# Altium PCB Plate_C.PcbDoc
Units mm, origin at the board's own origin, x right, y up, seen from the top; angles counter-clockwise.
Board outline 100 x 100 mm, 2 copper layers (Top Layer, Bottom Layer), stack 0.97 mm thick; 6 components, 2 nets, 10 pads, 0 vias.
Unrouted connection lines stored in the file: 2.
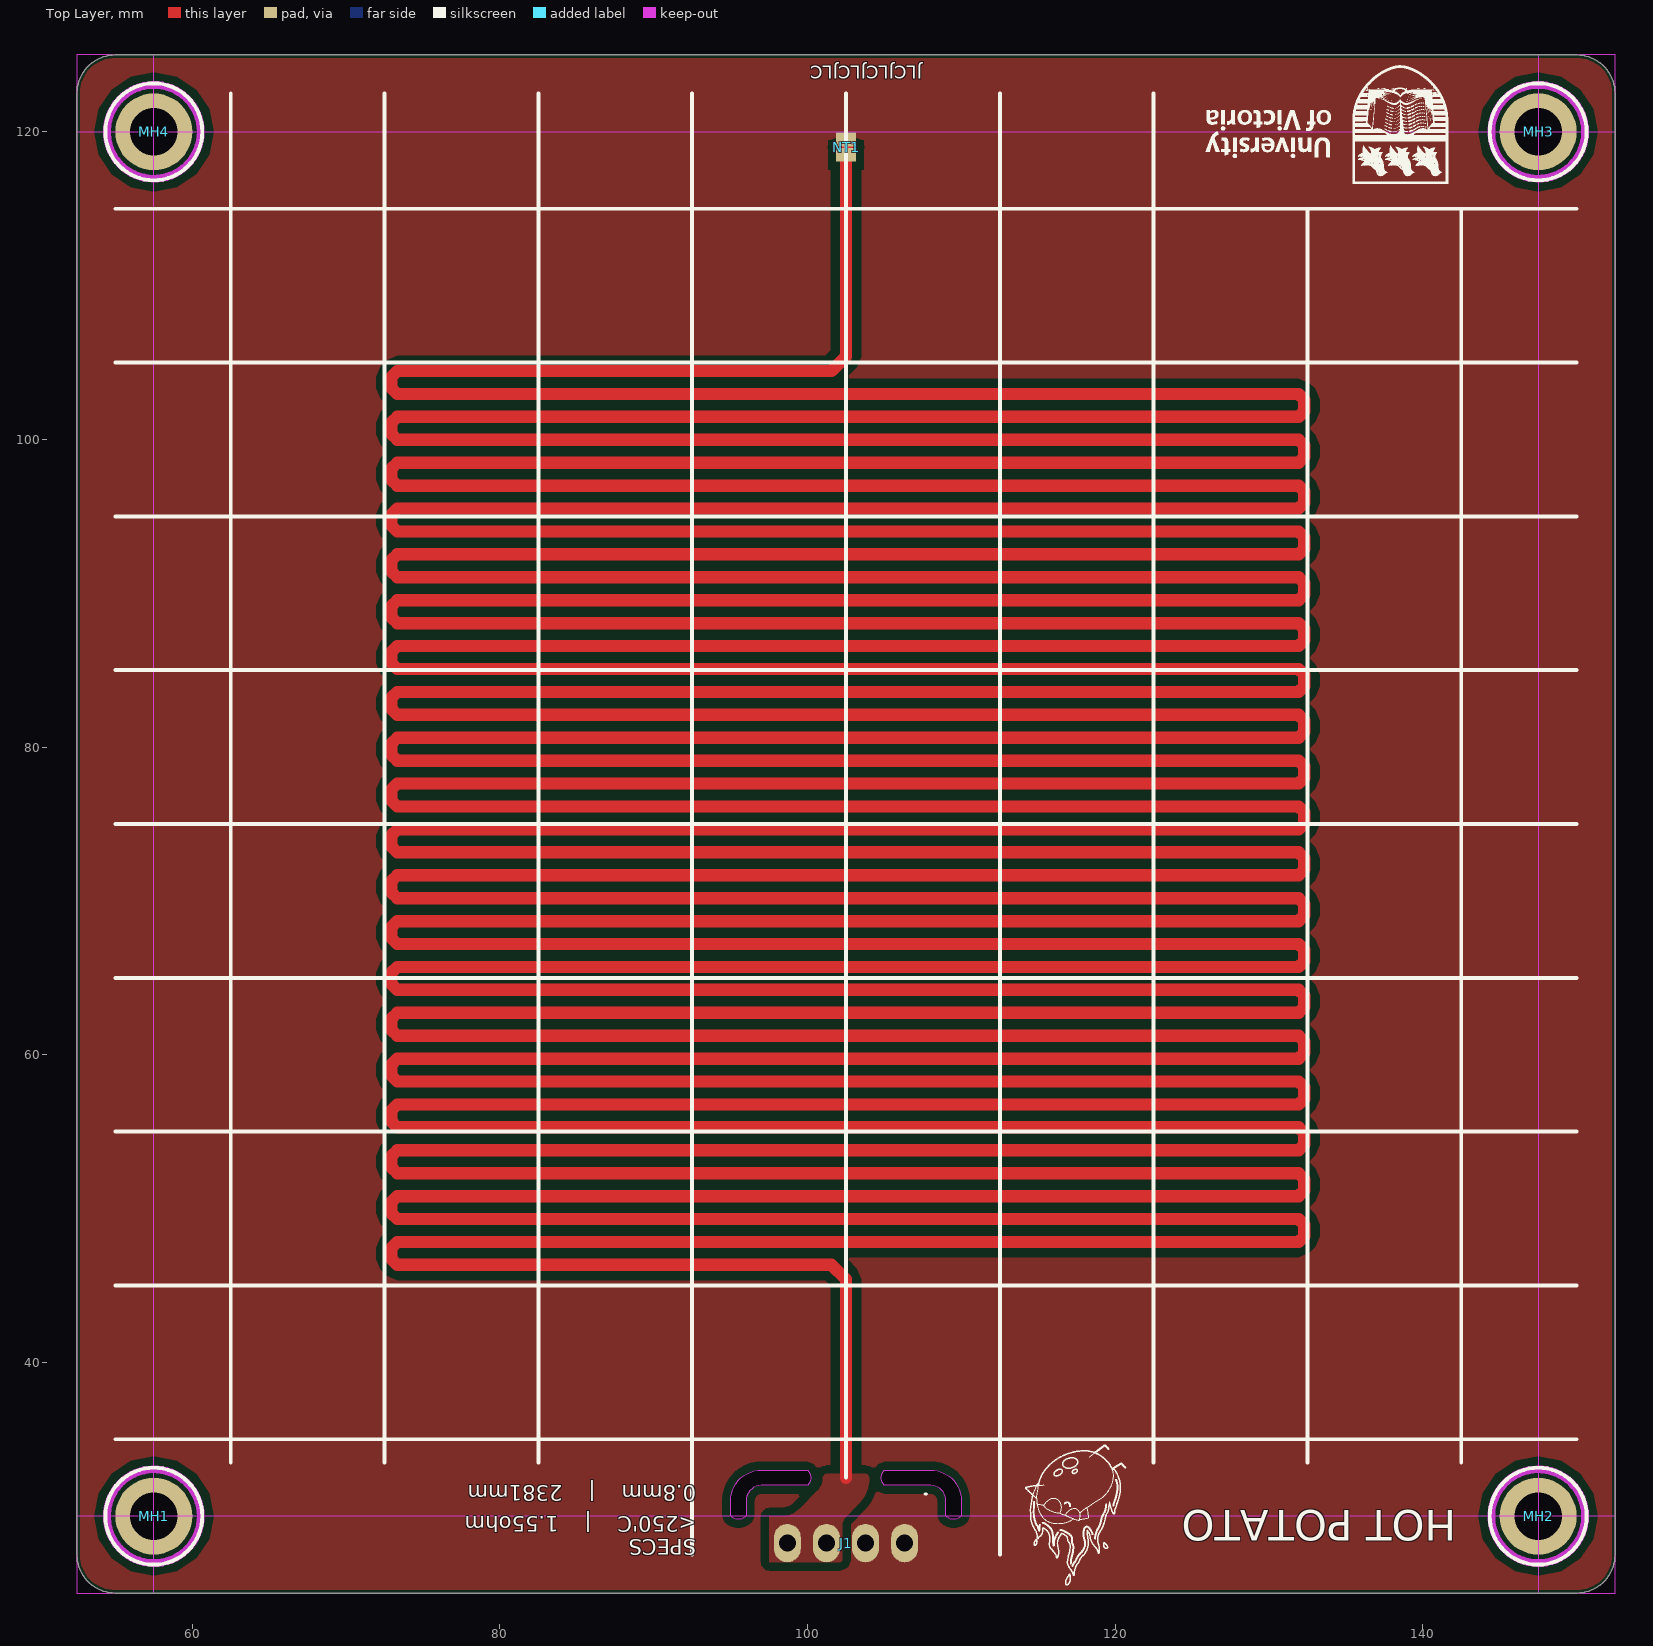
[diagram p0: Top Layer view]
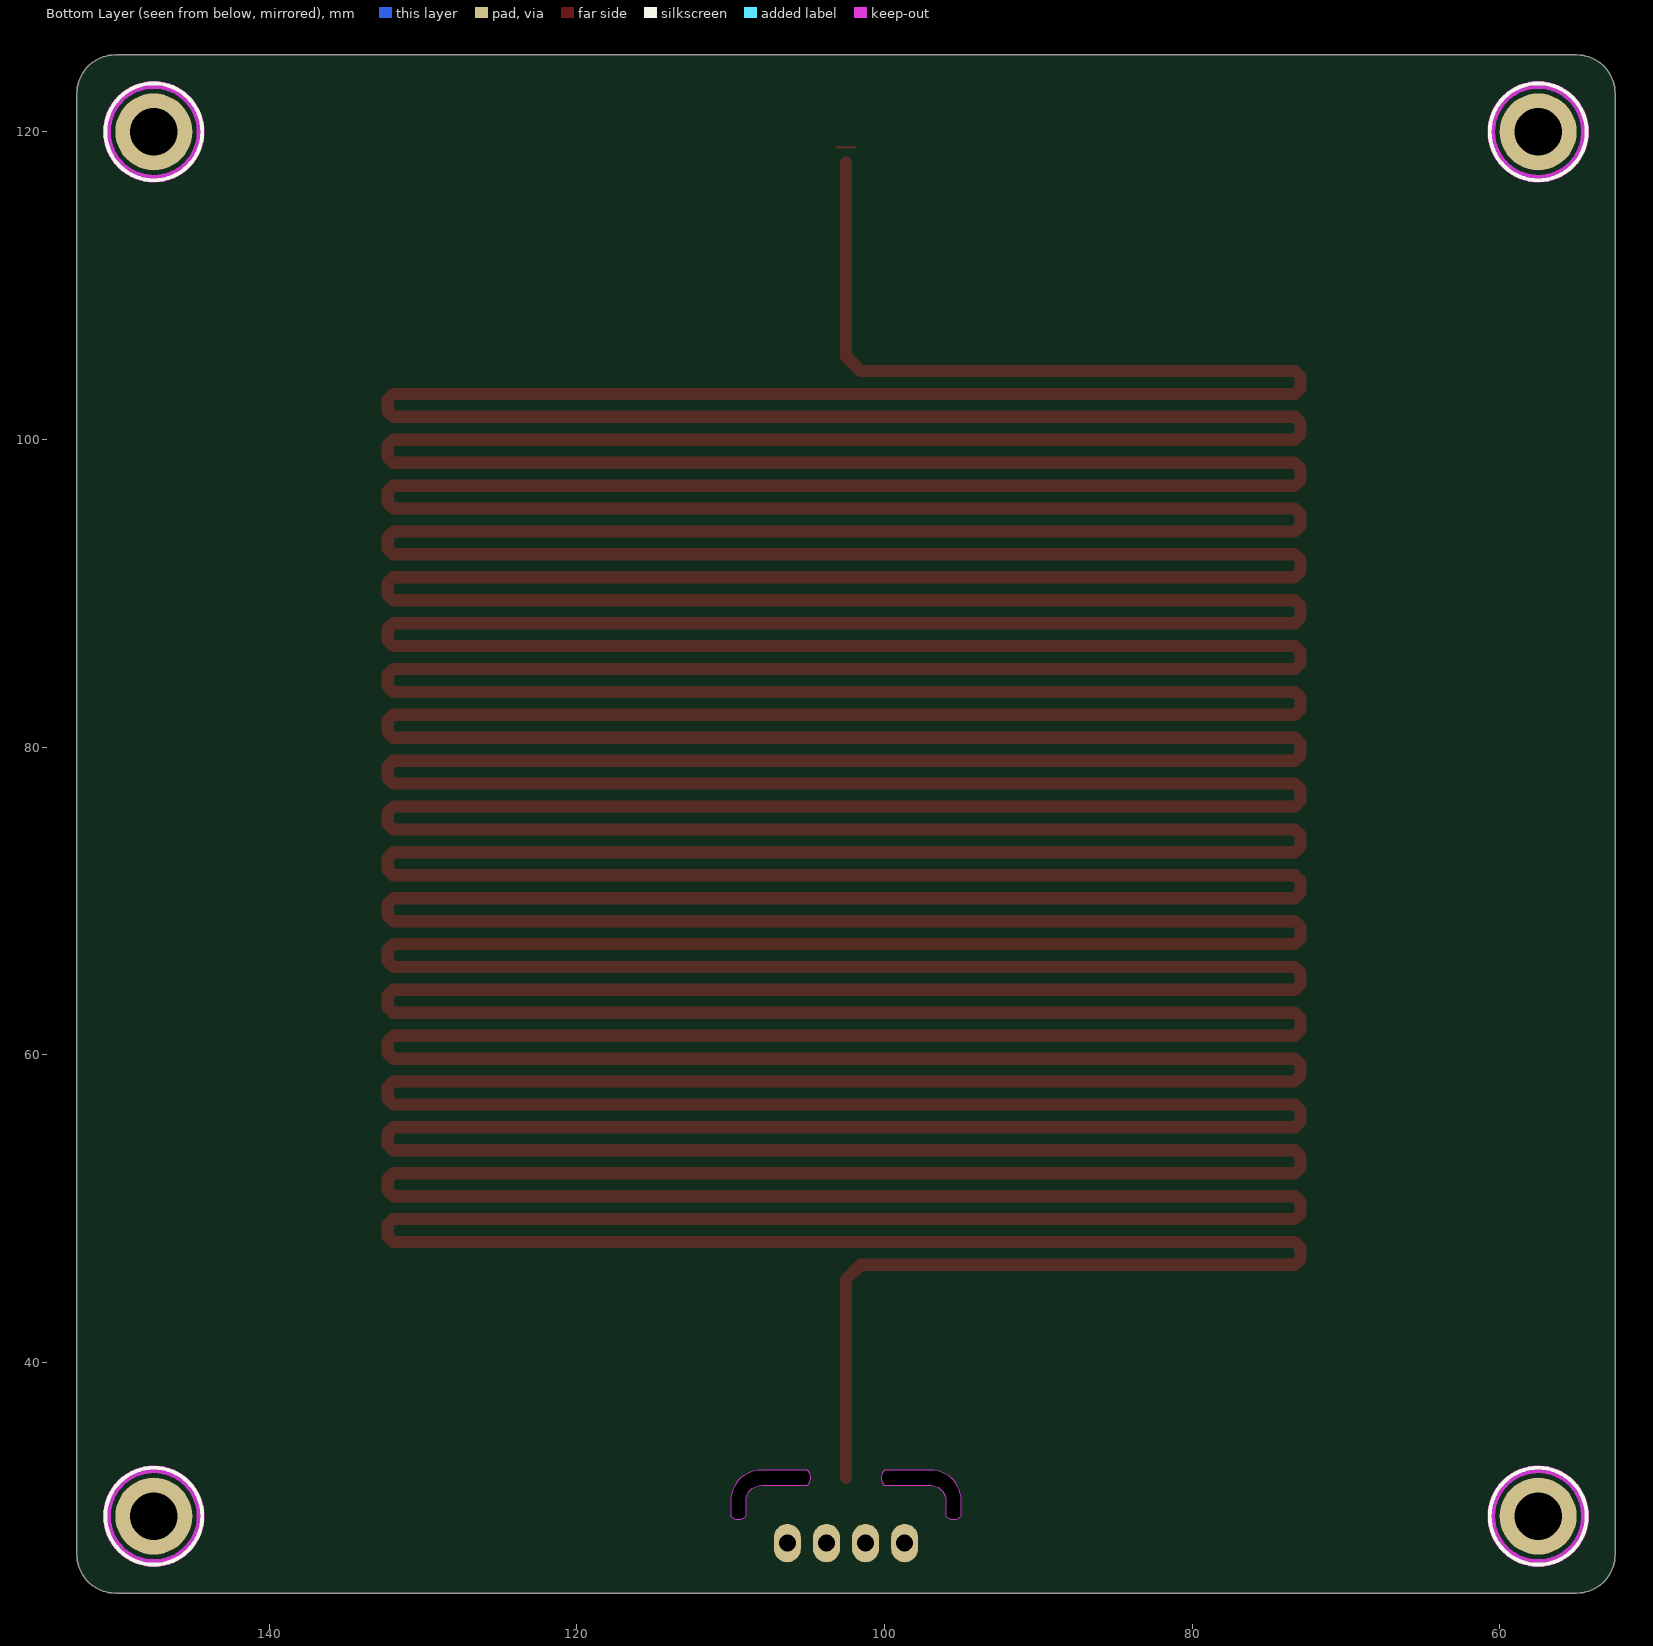
[diagram p1: Bottom Layer view, seen from below]

## Layer stack, top to bottom
Top Solder: solder mask 0.0127, Solder Resist, Dk 3.8
Top Layer: signal copper 0.035
Dielectric: core 0.9, FR-4, Dk 4.5
Bottom Layer: signal copper 0.035
Bottom Solder: solder mask 0.0127, Solder Resist, Dk 3.8

## Board outline
52.5,27.5 ccw(c55,27.5) 55,25 150,25 ccw(c150,27.5) 152.5,27.5 152.5,122.5 ccw(c150,122.5) 150,125 55,125 ccw(c55,122.5) 52.5,122.5
cut-out: 95,30 95,31 cw(c97,31) 97,33 100,33 cw(c99.5,32.5) 100,32 97,32 ccw(c97,31) 96,31 96,30 cw(c95.5,30.5)
cut-out: 105,32 cw(c105.5,32.5) 105,33 108,33 cw(c108,31) 110,31 110,30 cw(c109.5,30.5) 109,30 109,31 ccw(c108,31) 108,32

## Design rules (kind name [scope] priority, off if disabled: settings)
BoardOutlineClearance [All] p1: gap=0.2 ignorepadtopadclearanceinfootprint=FALSE
Clearance "Polygon Pour Clearance" [InPolygon] p1: gap=0.508 ignorepadtopadclearanceinfootprint=FALSE
Clearance [All] p2: gap=0.127 ignorepadtopadclearanceinfootprint=FALSE except(0.25: Arc-Hole Track-Hole SMDPad-Hole THPad-Hole Via-Hole Fill-Hole Poly-Hole Region-Hole Text-Hole)
ComponentClearance [All] p1: gap=0.127 collisioncheckmode=3 verticalgap=0.127 showdistances=TRUE
DiffPairsRouting [All] p1: maxlimit=0.254 minlimit=0.127 mostfreqgap=0.127 toplayer_minwidth=0.127 toplayer_maxwidth=25.4 toplayer_prefwidth=0.127 bottomlayer_minwidth=0.127 bottomlayer_maxwidth=25.4 bottomlayer_prefwidth=0.127 maxuncoupledlength=12.7
Height [All] p1: minheight=0 maxheight=1816.048 prefheight=12.7
HoleSize [All] p1: absolutevalues=TRUE maxlimit=6.3 minlimit=0.3 maxpercent=80.000 minpercent=20.000
HoleToHoleClearance [All] p1: gap=0.25 allowstackedmicrovias=FALSE
MinimumAnnularRing [All] p1: minimumring=0.076
MinimumSolderMaskSliver [All] p1: minsoldermaskwidth=0
PlaneClearance [All] p1: clearance=0.127
PlaneConnect PlaneConnectPowerPads [InPadClass('PowerPads')] p1: planeconnectstyle=Direct reliefexpansion=0.508 reliefentries=4 reliefconductorwidth=0.254 reliefairgap=0.254
PlaneConnect [All] p2: pad.planeconnectstyle=Relief pad.reliefexpansion=0.3 pad.reliefentries=4 pad.reliefconductorwidth=0.127 pad.reliefairgap=0.127 via.planeconnectstyle=Direct via.reliefexpansion=0.3 via.reliefentries=4 via.reliefconductorwidth=0.127 via.reliefairgap=0.127
PolygonConnect PolygonConnectPowerPads [All vs (InPadClass('PowerPads'))] p1: connectstyle=Direct reliefconductorwidth=0.254 reliefentries=4 polygonreliefangle="90 Angle" airgapwidth=0.254
PolygonConnect [All] p2: thpad.connectstyle=Relief thpad.reliefconductorwidth=0.127 thpad.reliefentries=4 thpad.polygonreliefangle="90 Angle" thpad.airgapwidth=0.127 smdpad.connectstyle=Relief smdpad.reliefconductorwidth=0.127 smdpad.reliefentries=4 smdpad.polygonreliefangle="90 Angle" smdpad.airgapwidth=0.127 via.connectstyle=Direct via.reliefconductorwidth=0.127 via.reliefentries=4 via.polygonreliefangle="90 Angle" via.airgapwidth=0.127
RoutingVias [All] p1: holewidth=0.3 width=0.6 viastyle="Through Hole" minholewidth=0.3 minwidth=0.6 maxholewidth=0.6 maxwidth=6.6
SilkToSilkClearance [All] p1: silktosilkclearance=0
SilkToSolderMaskClearance [IsPad] p1: minsilkscreentomaskgap=0.127 clearancetoexposedcopper=TRUE
SolderMaskExpansion [All] p1: expansion=0.075 istentingtop=FALSE
Width [All] p1: maxlimit=25.4 minlimit=0.127 preferedwidth=0.127 minimp=50.000000 maximp=50.000000 favimp=50.000000
20 further rules are at their usual default settings.

## Classes and differential pairs
component class plate: J1 MH1 MH2 MH3 MH4

## Components (designator, comment, footprint, x,y, rotation, side; value= is the part's Value field where it differs from the comment)
J1 "282834-4" "TE 282834-4" 102.5,28.25 r180 top
MH1 "3mm" Mount-Hole_3mm 57.5,30 r0 top locked
MH2 "3mm" Mount-Hole_3mm 147.5,30 r0 top locked
MH3 "3mm" Mount-Hole_3mm 147.5,120 r0 top locked
MH4 "3mm" Mount-Hole_3mm 57.5,120 r0 top locked
NT1 "Net Tie" NetTie_50mil 102.5,119 r270 top net-tie

## Footprints (in the part's own frame and the unit in brackets; to place one, negate y for a bottom-side part, rotate by r counter-clockwise, add the part's x,y. Pads: shape width x height; smd on the part's side, far side on the other; paste and mask are expansions set on the pad)
Mount-Hole_3mm [mm]
  round 5 hole 3.1: 1(0,0)
  Keep-Out Layer circle w0.508: c0,0 r3.048
  silkscreen extent -3.15,-3.15 3.15,3.15, body extent -2.25,-2.6 2.25,2.6, height 4.19
NetTie_50mil [mm]
  rect 0.889x1.27 smd mask+0.102: 1(-0.5,0) 2(0.5,0)
  Top Layer region: -0.075,0.635 0.075,0.635 0.075,-0.635 -0.075,-0.635
"TE 282834-4" [mm]
  oval 1.75x2.5 hole 1.1: 1(-3.81,0) 2(-1.27,0) 3(1.27,0) 4(3.81,0)
  silkscreen extent -5.24,-3.2 -5.14,-3.2, body extent -5.31,-3.25 5.31,3.25, height 10

## Part data
J1: "TERM BLK 4P SIDE ENT 2.54MM PCB", Color=Green, Current=10A, Manufacturer="TE Connectivity AMP Connectors", Supplier Part Number 1=A98335-ND, Voltage=150V, ComponentLink1Description=Datasheet, ComponentLink1URL=https://www.te.com/commerce/DocumentDelivery/DDEController?Action=srchrtrv&DocNm=282834&DocType=Customer+Drawing&DocLang=English, ComponentLink2Description="DigiKey Link", ComponentLink2URL=http://digikey.com/product-detail/en/te-connectivity-amp-connectors/282834-4/A98335-ND/1153265, LastUpdated="2020-01-15 4:16:05 AM", Lifecycle Status=Active, Mating Orientation="Horizontal with Board", Minimum Order=1, Mounting Type="Through Hole", Number of Levels=1, Packaging=Bulk, Part Number=282834-4, Part Status=Active, Pitch="0.100\" (2.54mm)", Positions Per Level=4, Price=2.68, Series=Buchanan, Supplier 1=DigiKey, Wire Gauge="16-30 AWG", Wire Termination="Screw - Rising Cage Clamp"
MH1 MH2 MH3 MH4: library part Mount_Hole_3mm, "Mounting Hole 3mm plated"
NT1: library part NetTie_50mil, "Net Tie with 50mil trace"

## Nets (pads, with @x,y where several pads share a name; then routed paths per layer and width w, separated by ;. In a path a pad name is that pad's centre, name@x,y a point inside that pad or via, vN(x,y) a via of type N, cw(c..) or ccw(c..) an arc to the next point about the centre after c; other vN are vias at no path point)
PWR: J1.3 J1.4 NT1.2 | length 2381.5
  Top Layer w0.8: 102.5,32.5 102.5,45 102.5,45.4 101.563,46.337 73.33,46.337 72.958,46.71 72.958,47.455 73.33,47.827 131.928,47.827 132.301,48.2 132.301,48.945 131.928,49.317 73.33,49.317 72.958,49.69 72.958,50.435 73.33,50.807 131.928,50.807 132.301,51.18 132.301,51.925 131.928,52.297 73.33,52.297 72.958,52.67 72.958,53.415 73.33,53.787 131.928,53.787 132.301,54.16 132.301,54.905 131.928,55.277 73.33,55.277 72.958,55.65 72.958,56.395 73.33,56.767 131.928,56.767 132.301,57.14 132.301,57.885 131.928,58.257 73.33,58.257 72.958,58.63 72.958,59.375 73.33,59.747 131.928,59.747 132.301,60.12 132.301,60.865 131.928,61.237 73.33,61.237 72.958,61.61 72.958,62.355 73.33,62.727 131.928,62.727 132.301,63.1 132.301,63.845 131.928,64.217 73.33,64.217 72.958,64.59 72.958,65.335 73.33,65.707 131.928,65.707 132.301,66.08 132.301,66.825 131.928,67.197 73.33,67.197 72.958,67.57 72.958,68.315 73.33,68.687 131.928,68.687 132.301,69.06 132.301,69.805 131.928,70.177 73.33,70.177 72.958,70.55 72.958,71.295 73.33,71.667 131.928,71.667 132.301,72.04 132.301,72.785 131.928,73.157 73.33,73.157 72.958,73.53 72.958,74.275 73.33,74.647 131.928,74.647 132.301,75.02 132.301,75.765 131.928,76.137 73.33,76.137 72.958,76.51 72.958,77.255 73.33,77.627 131.928,77.627 132.301,78 132.301,78.745 131.928,79.117 73.33,79.117 72.958,79.49 72.958,80.235 73.33,80.607 131.928,80.607 132.301,80.98 132.301,81.725 131.928,82.097 73.33,82.097 72.958,82.47 72.958,83.215 73.33,83.587 131.928,83.587 132.301,83.96 132.301,84.705 131.928,85.077 73.33,85.077 72.958,85.45 72.958,86.195 73.33,86.567 131.928,86.567 132.301,86.94 132.301,87.685 131.928,88.057 73.33,88.057 72.958,88.43 72.958,89.175 73.33,89.547 131.928,89.547 132.301,89.92 132.301,90.665 131.928,91.037 73.33,91.037 72.958,91.41 72.958,92.155 73.33,92.527 131.928,92.527 132.301,92.9 132.301,93.645 131.928,94.017 73.33,94.017 72.958,94.39 72.958,95.135 73.33,95.507 131.928,95.507 132.301,95.88 132.301,96.625 131.928,96.997 73.33,96.997 72.958,97.37 72.958,98.115 73.33,98.487 131.928,98.487 132.301,98.86 132.301,99.605 131.928,99.977 73.33,99.977 72.958,100.35 72.958,101.095 73.33,101.467 131.928,101.467 132.301,101.84 132.301,102.585 131.928,102.957 73.33,102.957 72.958,103.33 72.958,104.075 73.33,104.447 101.563,104.447 102.5,105.385 102.5,106.527 102.5,118
RETURN: J1.1 J1.2 NT1.1
pads on no net: MH1.1 MH2.1 MH3.1 MH4.1

## Polygon pours and split planes (outlines as drawn)
RETURN on Top Layer "RETURN_L01_P007" (solid, pour order 7): 52.5,125 152.5,125 152.5,25 52.5,25
PWR on Top Layer "ggg" (solid, pour order 5): 101.25,32.75 103.75,32.75 cw(c103.75,32.5) 104,32.5 cw(c101.497,32.499) 103.266,30.728 102.473,29.936 ccw(c103.013,29.396) 102.25,29.396 102.25,27 97.5,27 97.5,30 98.293,30 ccw(c98.293,31.707) 99.5,30.5 100.646,31.646 ccw(c99.793,32.5) 101,32.5 cw(c101.25,32.5)

## Keep-outs
Top Layer:
  region: 52.5,120 152.5,120 152.5,125 52.5,125
  region: 52.5,25 152.5,25 152.5,30 52.5,30
  region: 147.5,125 147.5,25 152.5,25 152.5,125
  region: 52.5,125 52.5,25 57.5,25 57.5,125

## Silkscreen, mask and mechanical layers (free items; w line width, h text height)
Top Overlay:
  drawing of 192 lines, arcs and shapes, not listed
  text "JLCJLCJLCJLC" at 107.457,124.3 h0.85 r180
  text "0.8mm    |    2381mm" at 92.75,32 h1 r180
  text "HOT POTATO" at 142.164,30.4 h2 r180
  text "SPECS / <250'C    |    1.55ohm" at 92.75,30 h1 r180
Dimensions:
  lines w0.254: 52.5,75 152.5,75 ; 102.5,25 102.5,125 ; 152.5,25 52.5,125 ; 52.5,25 152.5,125 ; 52.5,25 52.5,25 ; 52.5,125 52.5,125 ; 52.5,125 52.5,125 ; 152.5,125 152.5,125
Board:
  lines w0.254: 52.5,27.5 ccw(c55,27.5) 55,25 150,25 ccw(c150,27.5) 152.5,27.5 152.5,122.5 ccw(c150,122.5) 150,125 55,125 ccw(c55,122.5) 52.5,122.5 52.5,27.5 ; 95,30 ccw(c95.5,30.5) 96,30 96,31 cw(c97,31) 97,32 100,32 ccw(c99.5,32.5) 100,33 97,33 ccw(c97,31) 95,31 95,30 ; 105,32 cw(c105.5,32.5) 105,33 108,33 cw(c108,31) 110,31 110,30 cw(c109.5,30.5) 109,30 109,31 ccw(c108,31) 108,32 105,32
Formula:
  text "Setting Trace Length and Width: /  Trace Length: PCB panel -> NET name PWR -> \"Routed Length\" /                Adj: Select Hotplate traces -> Tweak \"Space\" /  Trace Width: Select Base or tale of track -> properties -> \"Width\" /                Adj: Select Hotplate Traces -> *DELETE* -> Change Width -> \"Interactively tune Trace Length:" at 160,122.5 h1.52

## Dimensions
57.5,30 to 57.5,120 on Dimensions
57.5,120 to 147.5,120 on Dimensions
55,105 to 55,115 on Top Overlay
62.5,122.5 to 72.5,122.5 on Top Overlay
57.5,120 to 55,125 on Dimensions
57.5,120 to 52.5,122.5 on Dimensions
52.5,25 to 52.5,125 on Dimensions
52.5,125 to 152.5,125 on Dimensions